# Altium PCB SensorRPM.PcbDoc
Units mm, origin at the board's own origin, x right, y up, seen from the top; angles counter-clockwise.
Board outline 30 x 35 mm, 2 copper layers (Top Layer, Bottom Layer); 25 components, 15 nets, 62 pads, 0 vias.
Unrouted connection lines stored in the file: 44.
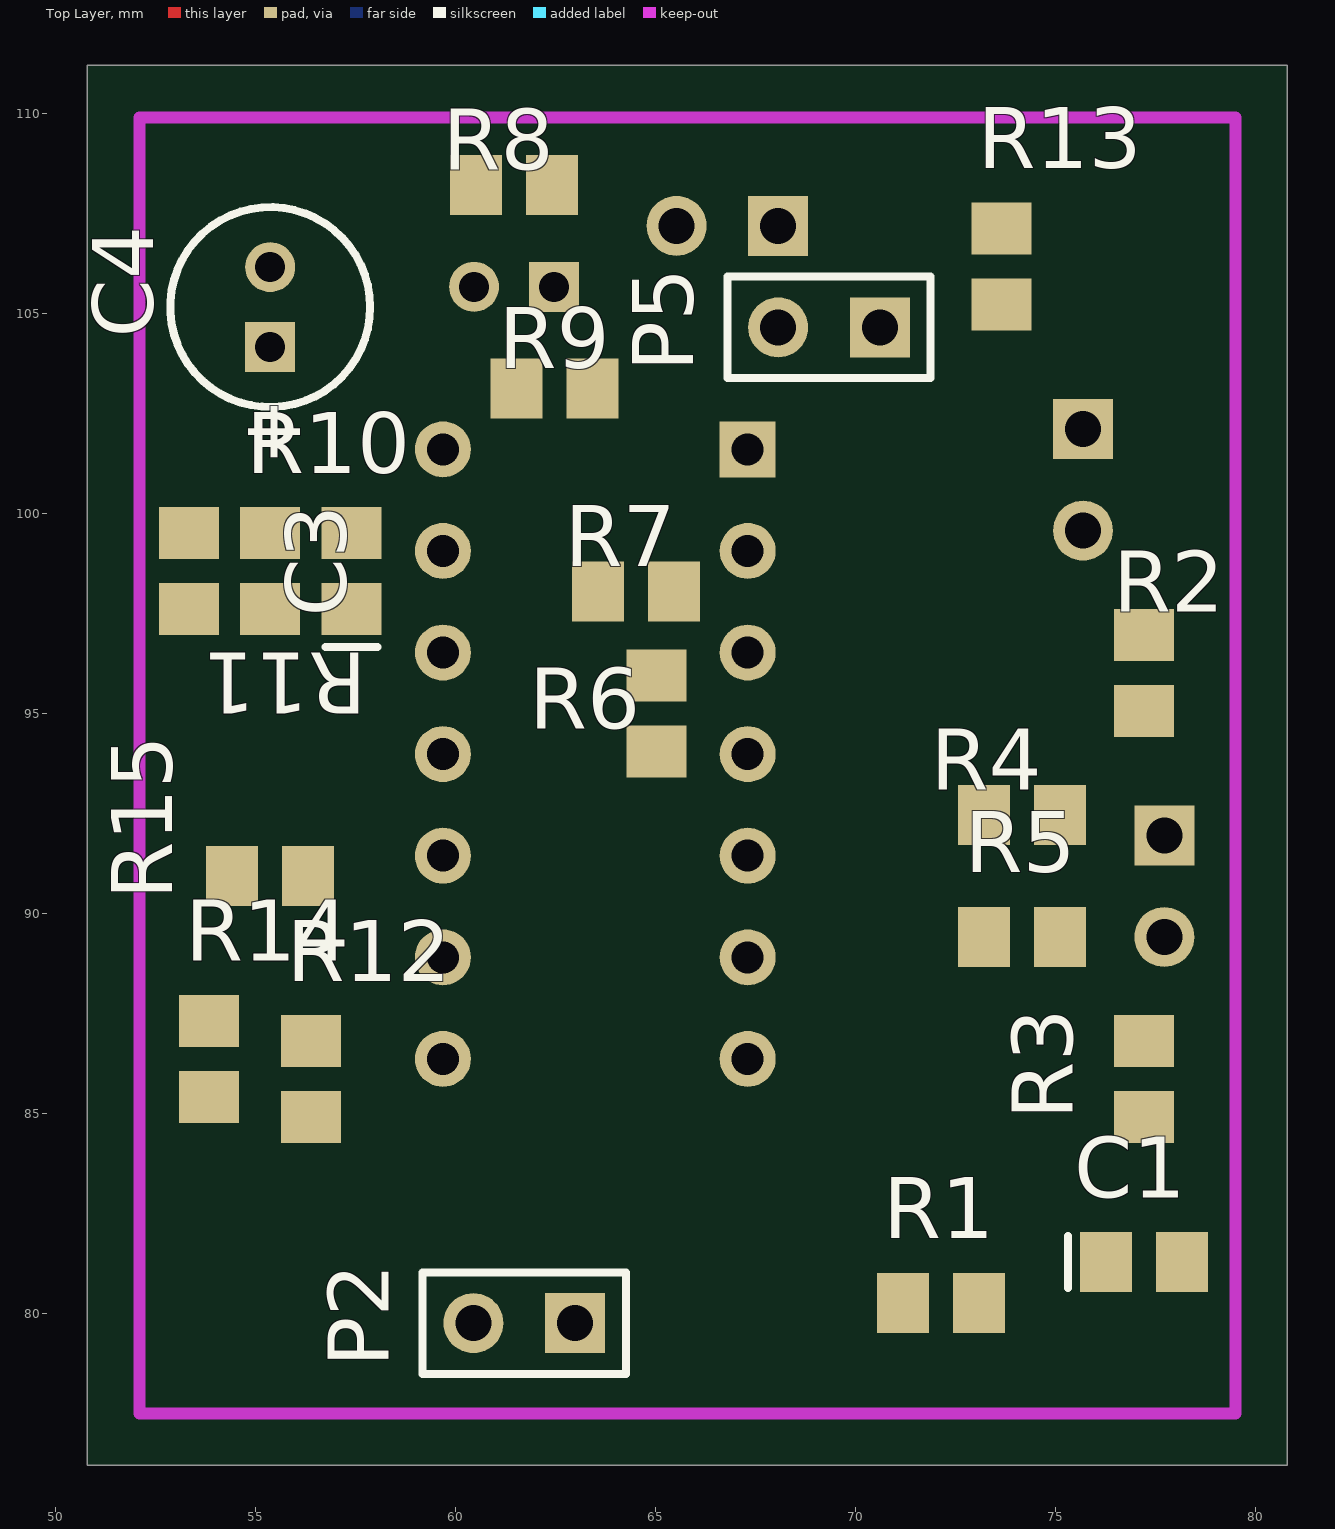
[diagram p0: Top Layer view]
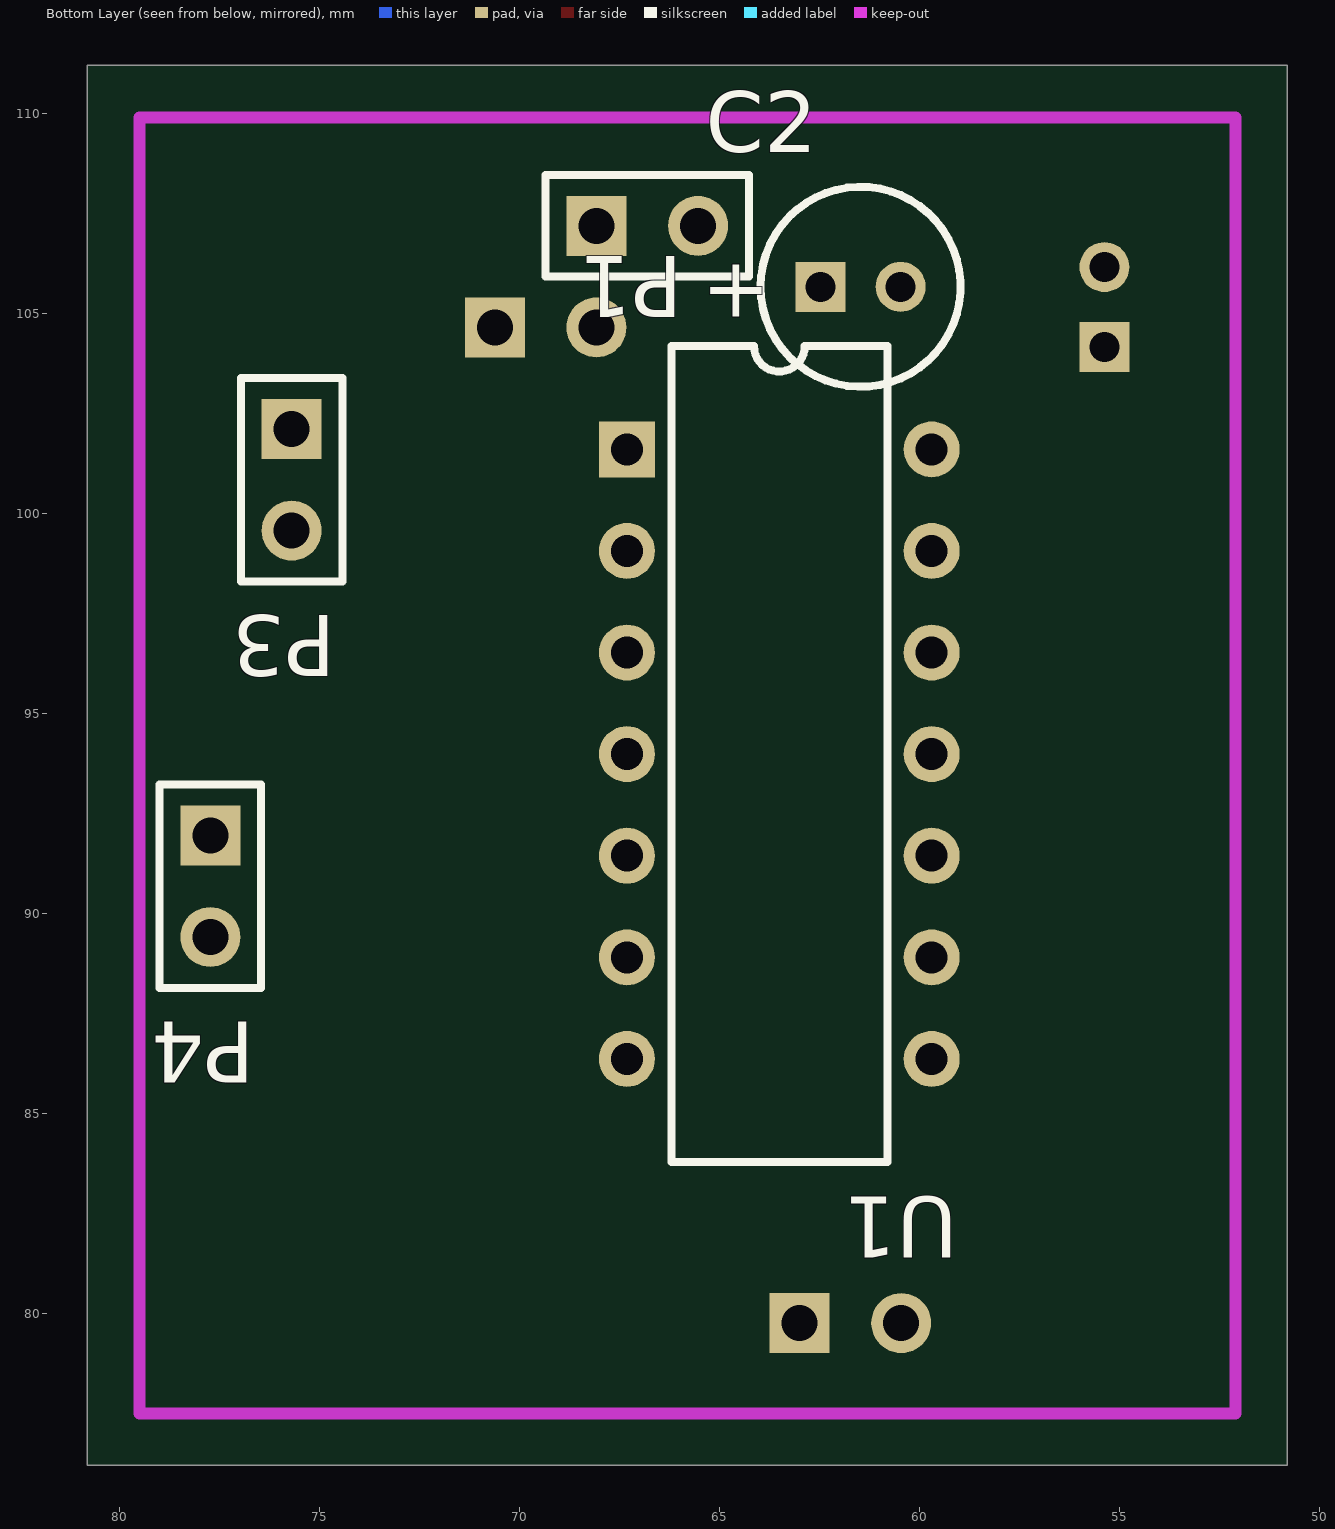
[diagram p1: Bottom Layer view, seen from below]

## Layer stack, top to bottom
Top Layer: signal copper 0.0356
Dielectric: dielectric 0.32, FR-4, Dk 4.8
Bottom Layer: signal copper 0.0356

## Board outline
50.8,76.2 80.8,76.2 80.8,111.2 50.8,111.2

## Design rules (kind name [scope] priority, off if disabled: settings)
Clearance [All] p1: gap=0.3
ComponentClearance [All] p1: gap=0.254 collisioncheckmode=3 verticalgap=0.254
PolygonConnect [All] p1: connectstyle=Direct reliefconductorwidth=0.254 reliefentries=4 polygonreliefangle="90 Angle"
RoomDefinition SensorRPM [InComponentClass('SensorRPM')] p1: confinementstyle=ConfineIn formatcopy=TRUE lockcomponents=FALSE outline 49.53,75.311 81.915,75.311 81.915,111.252 49.53,111.252
RoutingVias [All] p1: holewidth=0.8 width=2 viastyle="Through Hole" minholewidth=0.711 minwidth=1.27 maxholewidth=2 maxwidth=3
SolderMaskExpansion [All] p1: expansion=0.102
TestPointUsage [All] p1: valid=0 allowmultiple=FALSE
Testpoint [All] p1: side=15 testpointundercomponent=TRUE minsize=1.016 maxsize=2.54 preferedsize=1.524 minholesize=0 maxholesize=1.016 preferedholesize=0.813 testpointgrid=0.025 style=1023 order=0123456789
Width [All] p1: maxlimit=3 minlimit=0.3 preferedwidth=1
18 further rules are at their usual default settings.

## Components (designator, comment, footprint, x,y, rotation, side; value= is the part's Value field where it differs from the comment)
C1 "Cap Pol3" C0805 77.216,81.28 r0 top
C2 "Cap Pol1" B 61.468,105.664 r180 bottom
C3 "Cap Pol3" C0805 57.404,98.552 r90 top
C4 "Cap Pol1" B 55.372,105.156 r90 top
P1 "Header 2" HDR1X2 68.072,107.188 r180 bottom
P2 "Header 2" HDR1X2 62.992,79.756 r180 top
P3 "Header 2" HDR1X2 75.692,102.108 r270 bottom
P4 "Header 2" HDR1X2 77.724,91.948 r270 bottom
P5 "Header 2" HDR1X2 70.612,104.648 r180 top
R1 "Res Semi" 2012[0805] 72.136,80.264 r0 top
R2 "Res Semi" 2012[0805] 77.216,96.012 r90 top
R3 "Res Semi" 2012[0805] 77.216,85.852 r90 top
R4 "Res Semi" 2012[0805] 74.168,92.456 r0 top
R5 "Res Semi" 2012[0805] 74.168,89.408 r0 top
R6 "Res Semi" 2012[0805] 65.024,94.996 r270 top
R7 "Res Semi" 2012[0805] 64.516,98.044 r180 top
R8 "Res Semi" 2012[0805] 61.468,108.204 r0 top
R9 "Res Semi" 2012[0805] 62.484,103.124 r180 top
R10 "Res Semi" 2012[0805] 55.372,98.552 r90 top
R11 "Res Semi" 2012[0805] 53.34,98.552 r270 top
R12 "Res Semi" 2012[0805] 56.388,85.852 r90 top
R13 "Res Semi" 2012[0805] 73.66,106.172 r90 top
R14 "Res Semi" 2012[0805] 53.848,86.36 r90 top
R15 "Res Semi" 2012[0805] 55.372,90.932 r180 top
U1 "TL084ACJ" 632-08 63.5,93.98 r270 bottom

## Footprints (in the part's own frame and the unit in brackets; to place one, negate y for a bottom-side part, rotate by r counter-clockwise, add the part's x,y. Pads: shape width x height; smd on the part's side, far side on the other; paste and mask are expansions set on the pad)
632-08 [mm] "DIP; 14 Leads; Row Spacing 7.62 mm; Pitch 2.54 mm"
  rect 1.4x1.4 hole 0.8: 1(-7.62,-3.81)
  round 1.4 hole 0.8: 2(-5.08,-3.81) 3(-2.54,-3.81) 4(0,-3.81) 5(2.54,-3.81) 6(5.08,-3.81) 7(7.62,-3.81) 8(7.62,3.81) 9(5.08,3.81) 10(2.54,3.81) 11(0,3.81) 12(-2.54,3.81) 13(-5.08,3.81) 14(-7.62,3.81)
  silkscreen extent -10.2,-2.7 10.2,2.7
2012[0805] [mm] "Chip Resistor; Body 2.0 x 1.3 mm (LxW typ)"
  rect 1.3x1.5 smd: 1(-0.95,0) 2(0.95,0)
B [mm] "Capacitor, Electrolytic, Radial; Body 5 x 6.8 mm (Dia.xH typ); Pin Spacing 2 mm (typ)"
  rect 1.25x1.25 hole 0.75: 1(-1,0)
  round 1.25 hole 0.75: 2(1,0)
  silkscreen extent -2.5,-2.5 2.5,2.5
C0805 [mm] "Chip Capacitor; Body 2.0 x 1.2 mm (LxW typ)"
  rect 1.3x1.5 smd: 1(-0.95,0) 2(0.95,0)
  silkscreen extent -1.9,-0.65 -1.9,0.65
HDR1X2 [mm] "Connector; Header; 2 Position"
  rect 1.5x1.5 hole 0.9: 1(0,0)
  round 1.5 hole 0.9: 2(2.54,0)
  silkscreen extent -1.27,-1.27 3.81,1.27

## Part data
C1 C3: "Polarized Capacitor (Surface Mount)"
C2 C4: "Polarized Capacitor (Radial)"
P1 P2 P3 P4 P5: "Header, 2-Pin"
R1 R2 R3 R4 R5 R6 R7 R8 R9 R10 R11 R12 R13 R14 R15: "Semiconductor Resistor"
U1: "JFET-Input Operational Amplifier"

## Nets (pads, with @x,y where several pads share a name; then routed paths per layer and width w, separated by ;. In a path a pad name is that pad's centre, name@x,y a point inside that pad or via, vN(x,y) a via of type N, cw(c..) or ccw(c..) an arc to the next point about the centre after c; other vN are vias at no path point)
GND: C1.2 C4.2 P1.2 P2.2 P5.2 R3.1 R7.2 R9.1 R13.2 U1.11
NetC2_1: C2.1 U1.1
NetC2_2: C2.2 R8.1 R9.2 U1.13
NetC3_1: C3.1 R10.1 R11.2 U1.12
NetC3_2: C3.2 R10.2 U1.9 U1.14
NetC4_1: C4.1 R11.1
NetP2_1: P2.1 R1.1
NetP3_2: P3.2 R4.1 R5.1 U1.2
NetP4_1: P4.1 R2.1 R4.2
NetP4_2: P4.2 R3.2 R5.2
NetP5_1: P5.1 R15.2 U1.8
NetR6_1: R6.1 R7.1 U1.3
NetR12_2: R12.2 R13.1 R14.1
NetR14_2: R14.2 R15.1 U1.10
VCC: C1.1 P1.1 P3.1 R1.2 R2.2 R6.2 R8.2 R12.1 U1.4
pads on no net: U1.5 U1.6 U1.7

## Keep-outs
Keep-Out Layer:
  lines w0.3: 52.1,77.5 52.1,109.9 79.5,109.9 79.5,77.5 52.1,77.5

## Silkscreen, mask and mechanical layers (free items; w line width, h text height)
Drill Drawing:
  text ".LEGEND" at 86.741,82.042 h1.52
  text "Drill Drawing." at 85.88,78.74 h1.52

## Dimensions
52.1,77.5 to 52.1,109.9 on Mechanical 1
52.1,77.5 to 79.5,77.5 on Mechanical 1

## Text inside footprints (layer, text, board x,y; h text height)
C2: Bottom Overlay "+" at 65.443,104.914 h1.5
C4: Top Overlay "+" at 56.122,101.181 h1.5 r90